# EAGLE board Uno Shield (EAGLE 9.5.1)
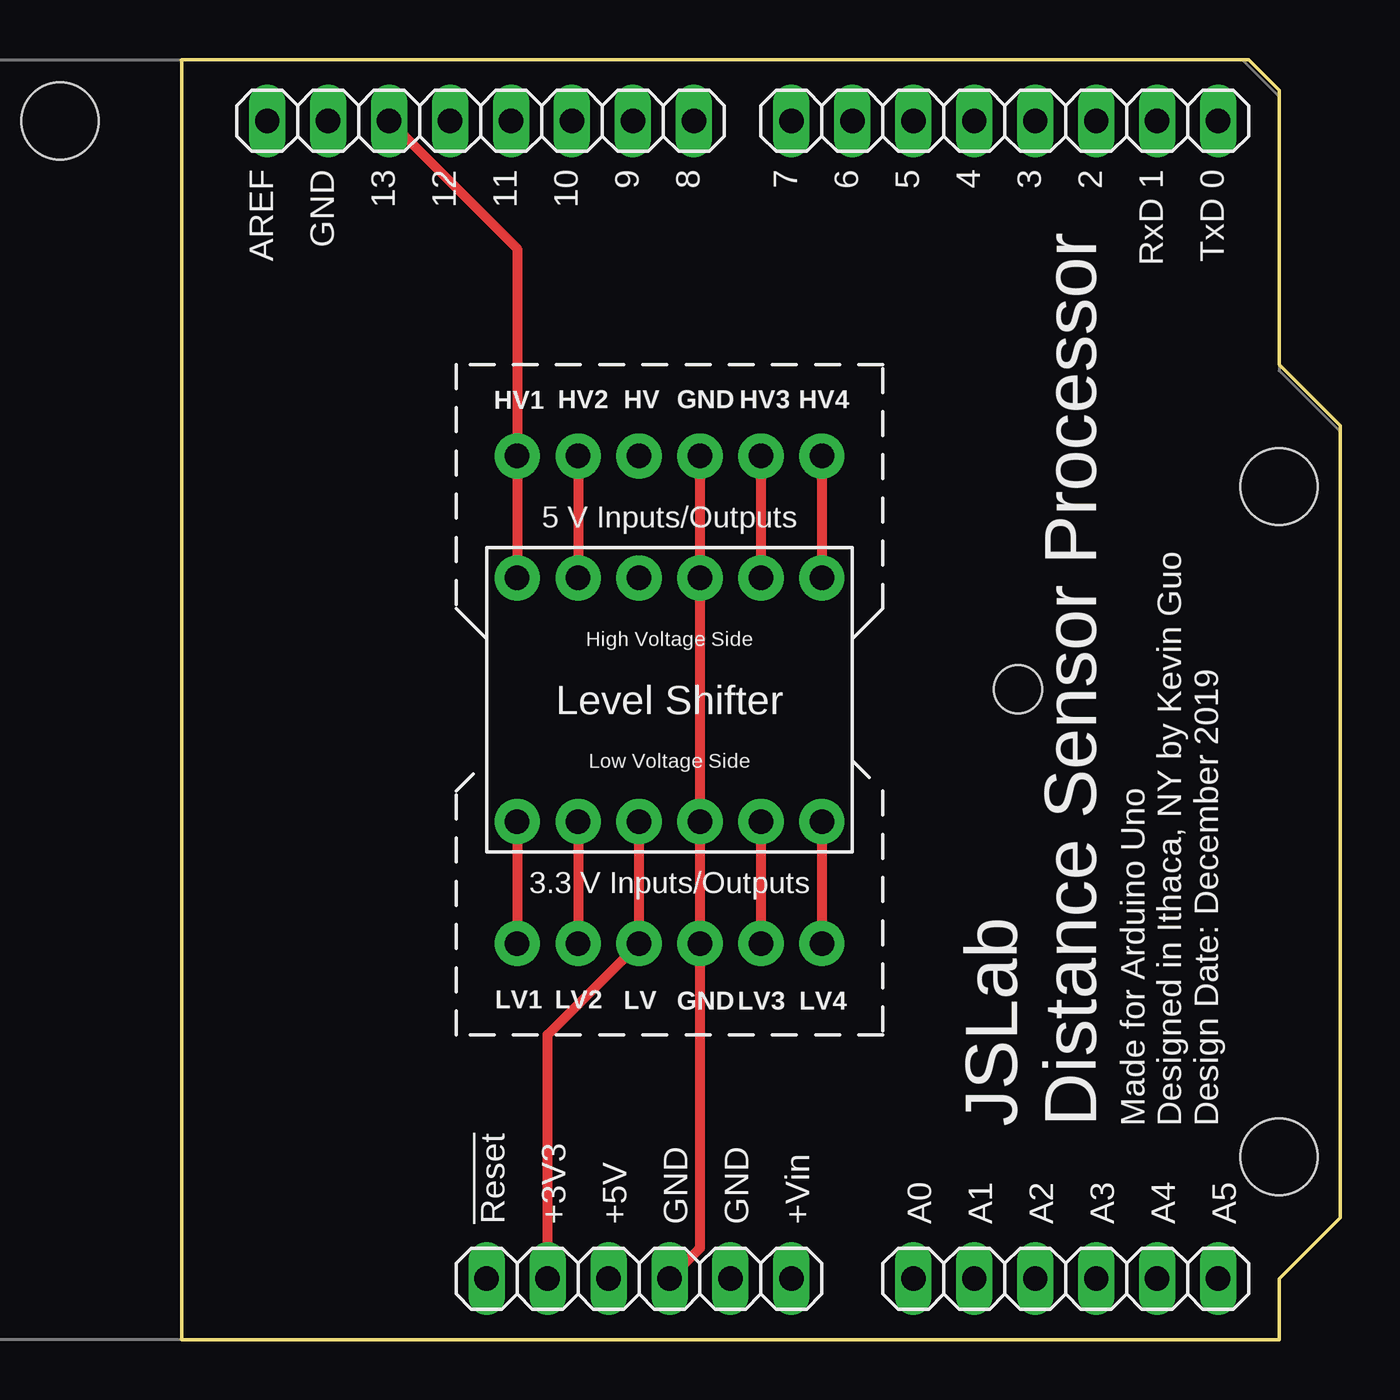
[diagram p0: board, top side]
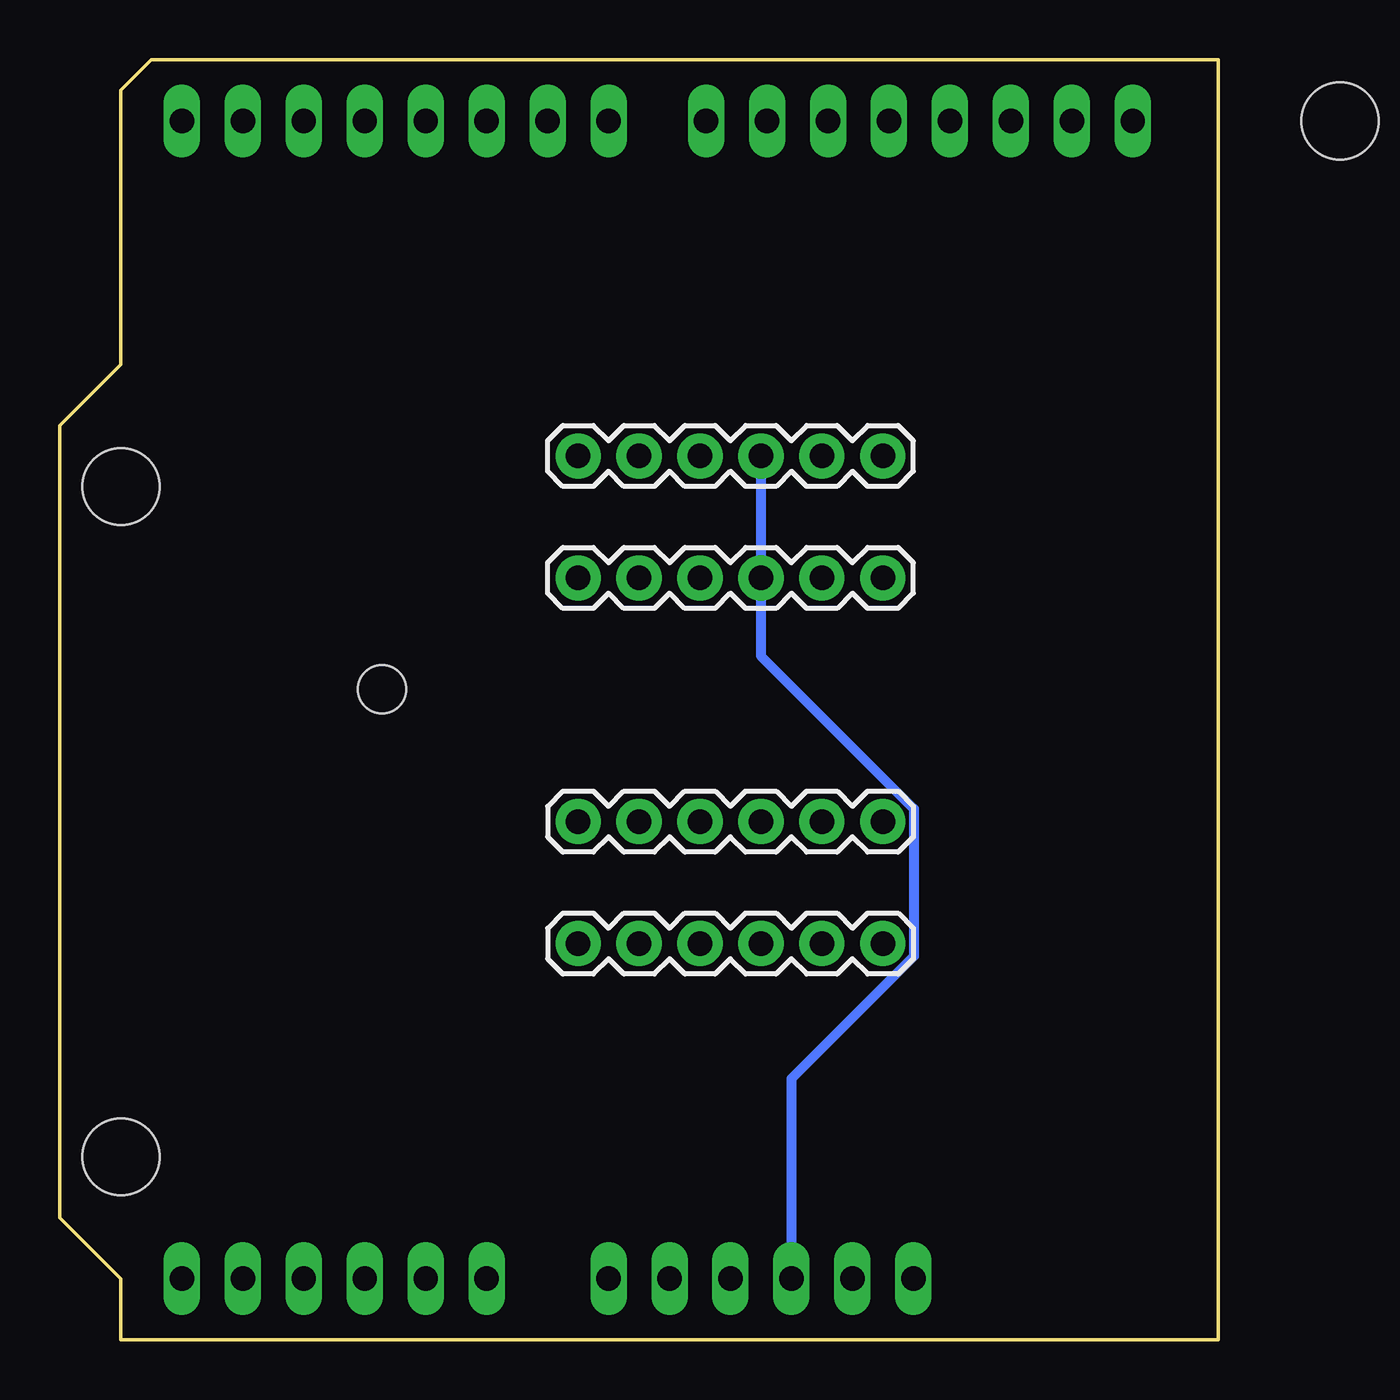
[diagram p1: board, bottom side, seen from below]

Size 48.26 x 53.34 mm. Coordinates in mm from the lower left corner, seen from the top.
Outline: 44.45,53.34 0,53.34 0,0 45.72,0 45.72,2.54 48.26,5.08 48.26,38.1 45.72,40.64 45.72,52.07 44.45,53.34
Copper layers (1*16): Top 0.035mm / dielectric 1.5mm / Bottom 0.035mm
Design rules "default": minimum track width 6mil, minimum drill 0.35mm, track to track 6mil, track to pad 6mil, pad to pad 6mil, via to via 6mil, smd to smd 6mil, copper to edge 40mil, drill to drill 6mil, minimum pad ring 10mil, minimum via ring 8mil, stop-mask expansion 4mil, vias tented up to drill 0mil, thermal gap 10mil

## Footprints (pad centres in the part's own frame; a part is rotated, then mirrored left to right if it is on the bottom)
ARDUINO2009 = drill 1.016 long: 1 33.02,2.54; 2 35.56,2.54; 3 38.1,2.54; 4 40.64,2.54; 5 43.18,2.54; 6 45.72,2.54; 7 50.8,2.54; 8 53.34,2.54; 9 55.88,2.54; 10 58.42,2.54; 11 60.96,2.54; 12 63.5,2.54; 13 63.5,50.8; 14 60.96,50.8; 15 58.42,50.8; 16 55.88,50.8; 17 53.34,50.8; 18 50.8,50.8; 19 48.26,50.8; 20 45.72,50.8; 21 41.656,50.8; 22 39.116,50.8; 23 36.576,50.8; 24 34.036,50.8; 25 31.496,50.8; 26 28.956,50.8; 27 26.416,50.8; 28 23.876,50.8 | hole 3.2: 15.24,50.8; 66.04,35.56; 66.04,7.62 | hole 2: 55.17,27.114
1X06 = drill 1.016 pad 1.88: 1 0,0; 2 2.54,0; 3 5.08,0; 4 7.62,0; 5 10.16,0; 6 12.7,0

## Placement (x,y rotation side)
E$1  [ARDUINO2009]  -20.32,0 0 top
JP1  [1X06]  26.67,21.59 0 bottom
JP2  [1X06]  13.97,31.75 180 bottom
JP3  [1X06]  26.67,16.51 0 bottom
JP4  [1X06]  13.97,36.83 180 bottom

## Library data of the parts
E$1 = arduino
JP1-JP4 = SparkFun

## Nets
LV2: JP1.5 JP3.5
S$1: E$1.2 JP1.4 JP3.4
S$2: E$1.26 JP2.1 JP4.1
S$3: JP2.2 JP4.2
S$4: E$1.4 JP1.3 JP2.4 JP3.3 JP4.4
S$5: E$1.3 JP2.3 JP4.3
S$6: JP2.5 JP4.5
S$7: JP2.6 JP4.6
S$8: JP1.1 JP3.1
S$9: JP1.2 JP3.2
S$10: JP1.6 JP3.6

## Tracks (layer width: path | path; a pad name or v marks a point on that pad's centre or on a via)
LV2
  Top 0.406: JP1.5 JP3.5
  Bottom 0.254: JP1.5 16.93,21.59
S$1
  Top 0.406: E$1.2 15.24,12.7 JP3.4 JP1.4
S$2
  Top 0.406: E$1.26 13.97,45.47 JP4.1 JP2.1
S$3
  Top 0.406: JP4.2 JP2.2
S$4
  Top 0.406: JP4.4 JP2.4 JP1.3 JP3.3 21.59,3.81 E$1.4
S$5
  Bottom 0.406: JP4.3 JP2.3 19.05,28.5 12.67,22.13 12.67,15.97 17.78,10.87 E$1.3
S$6
  Top 0.406: JP4.5 JP2.5
S$7
  Top 0.406: JP4.6 JP2.6
S$8
  Top 0.406: JP1.1 JP3.1
S$9
  Top 0.406: JP1.2 JP3.2
S$10
  Top 0.406: JP1.6 JP3.6

## Text on the board
tPlace: HV1 | HV2 | HV | GND | HV3 | HV4 | 5 V Inputs/Outputs | High Voltage Side | Level Shifter | Low Voltage Side | 3.3 V Inputs/Outputs | LV1 | LV2 | LV | GND | LV3 | LV4
tNames: JSLab / Distance Sensor Processor | Made for Arduino Uno / Designed in Ithaca, NY by Kevin Guo / Design Date: December 2019